# Altium PCB PCB.PcbDoc (part 1 of 5)
Units mil, origin at the board's own origin, x right, y up, seen from the top; angles counter-clockwise.
Board outline 7500 x 6500 mil, 2 copper layers (Top Layer, Bottom Layer); 229 components, 273 nets, 1476 pads, 506 vias.
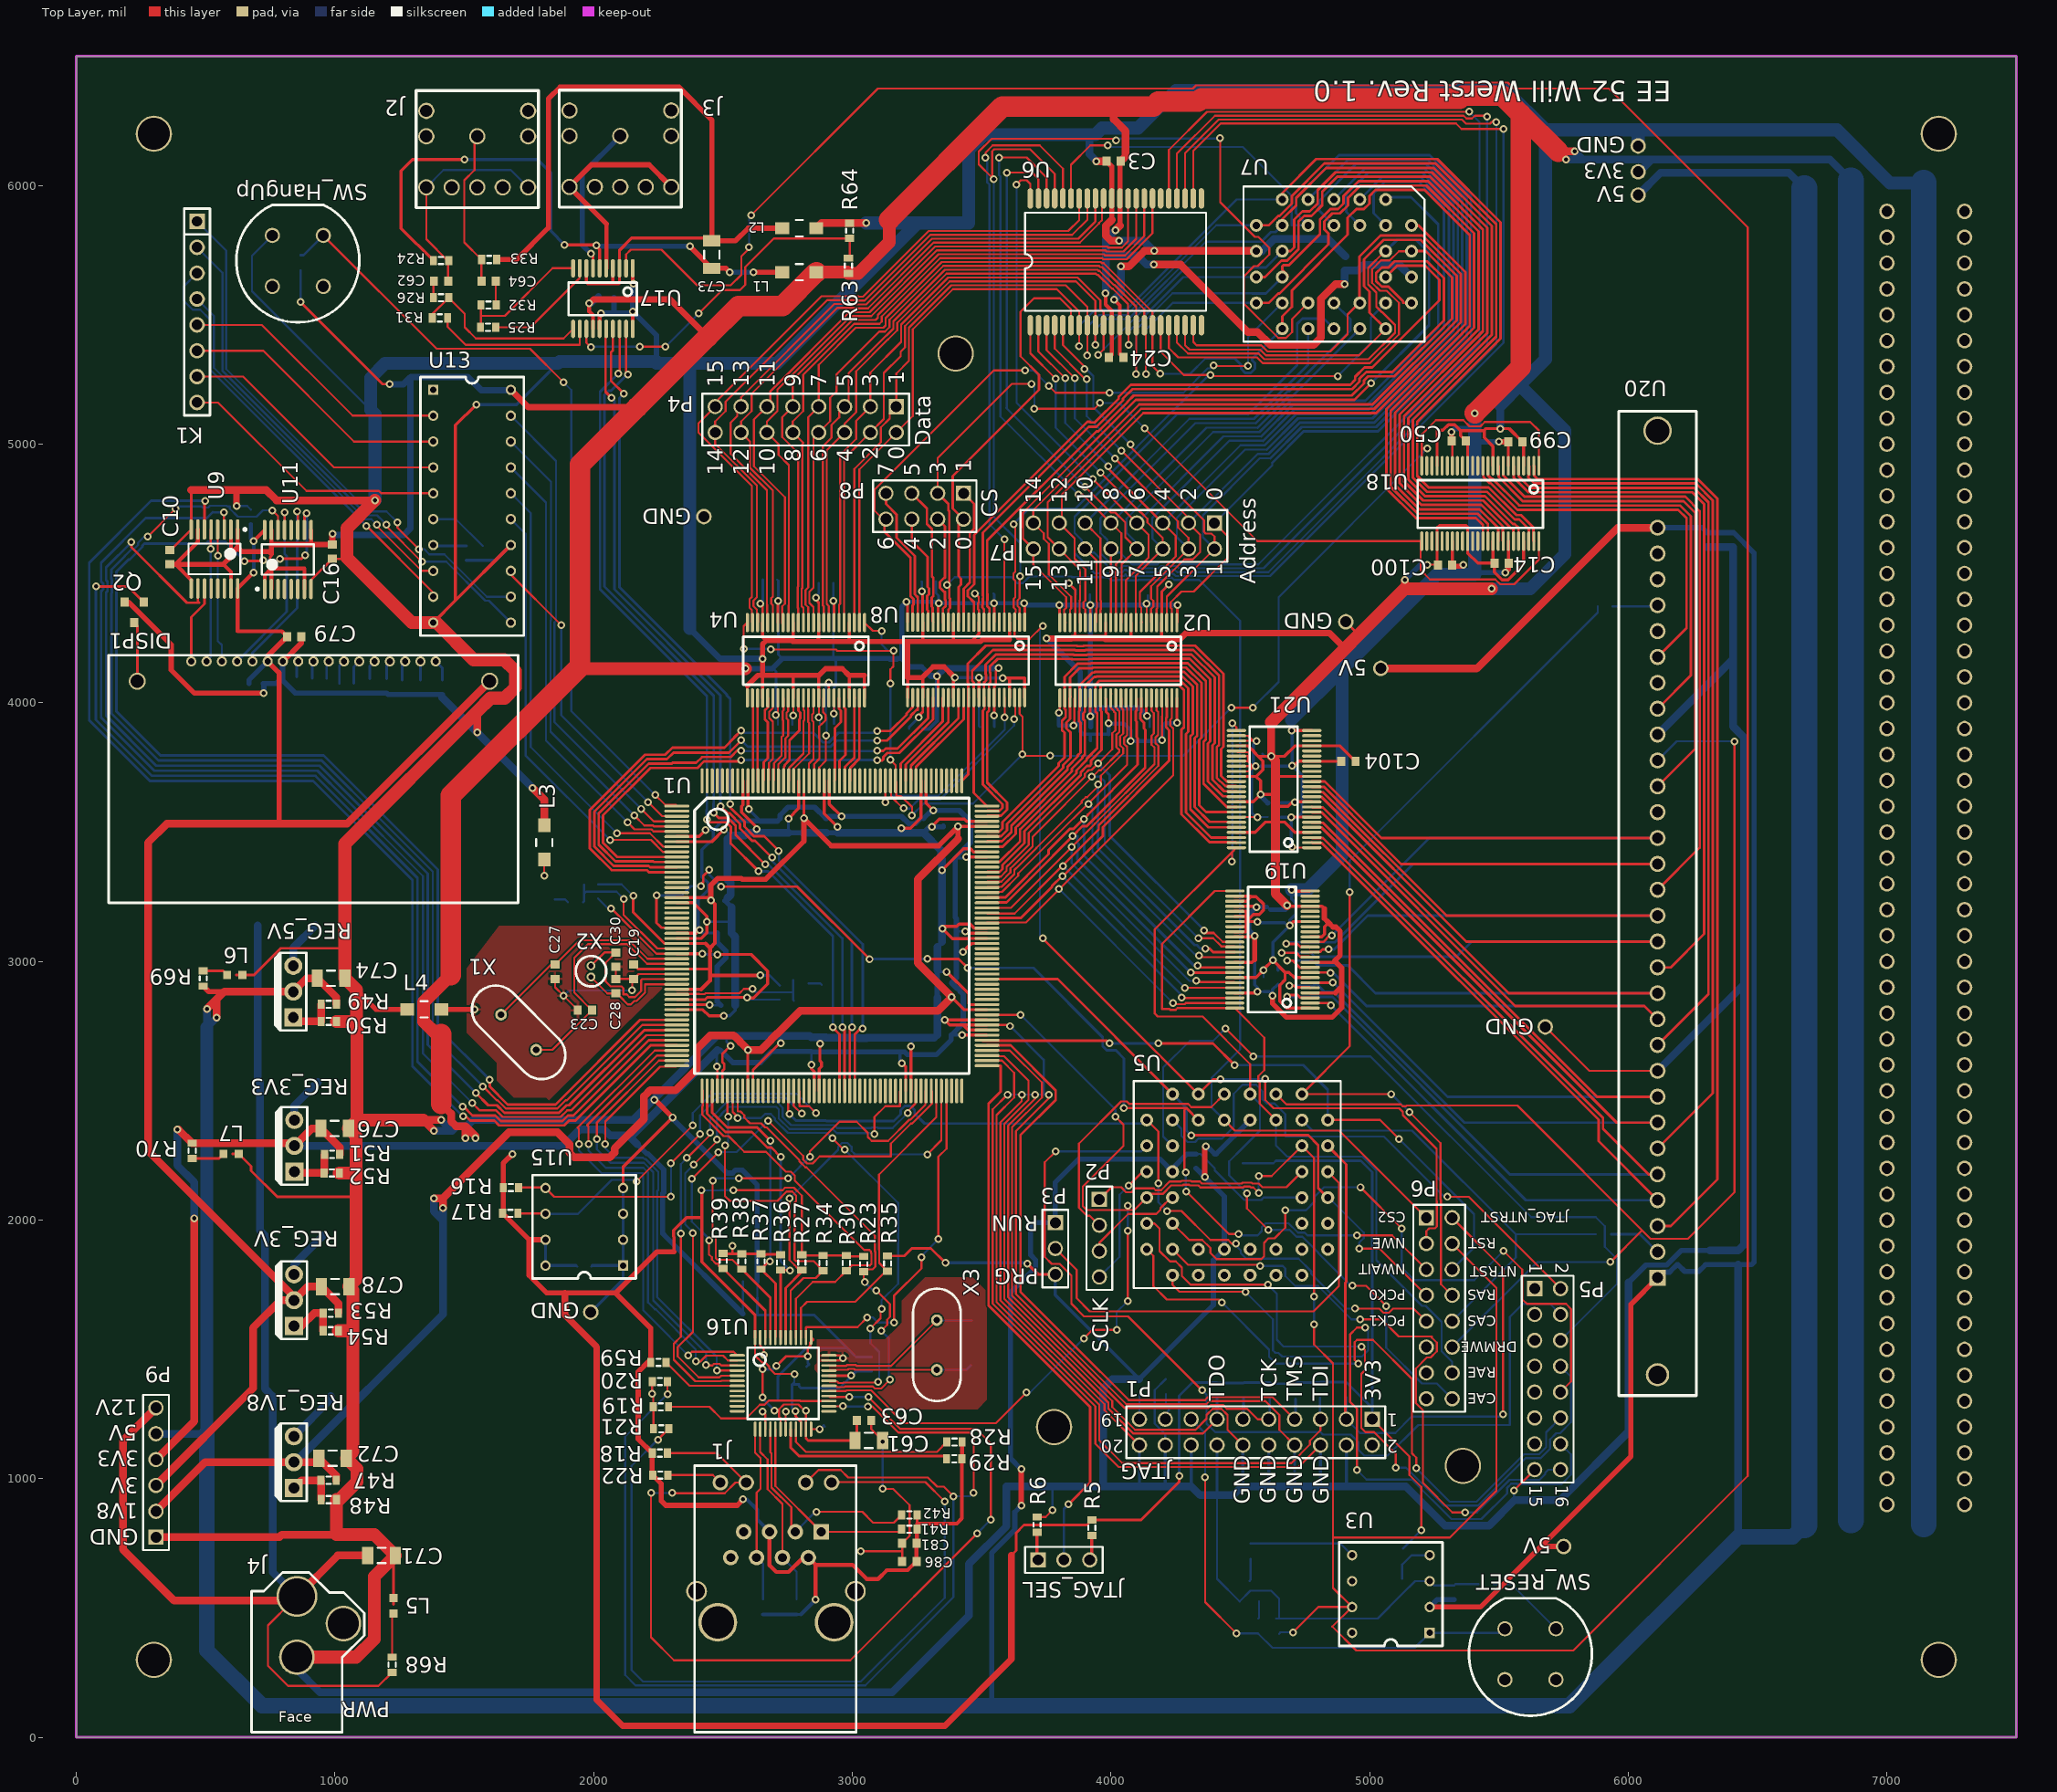
[diagram p0: Top Layer view]
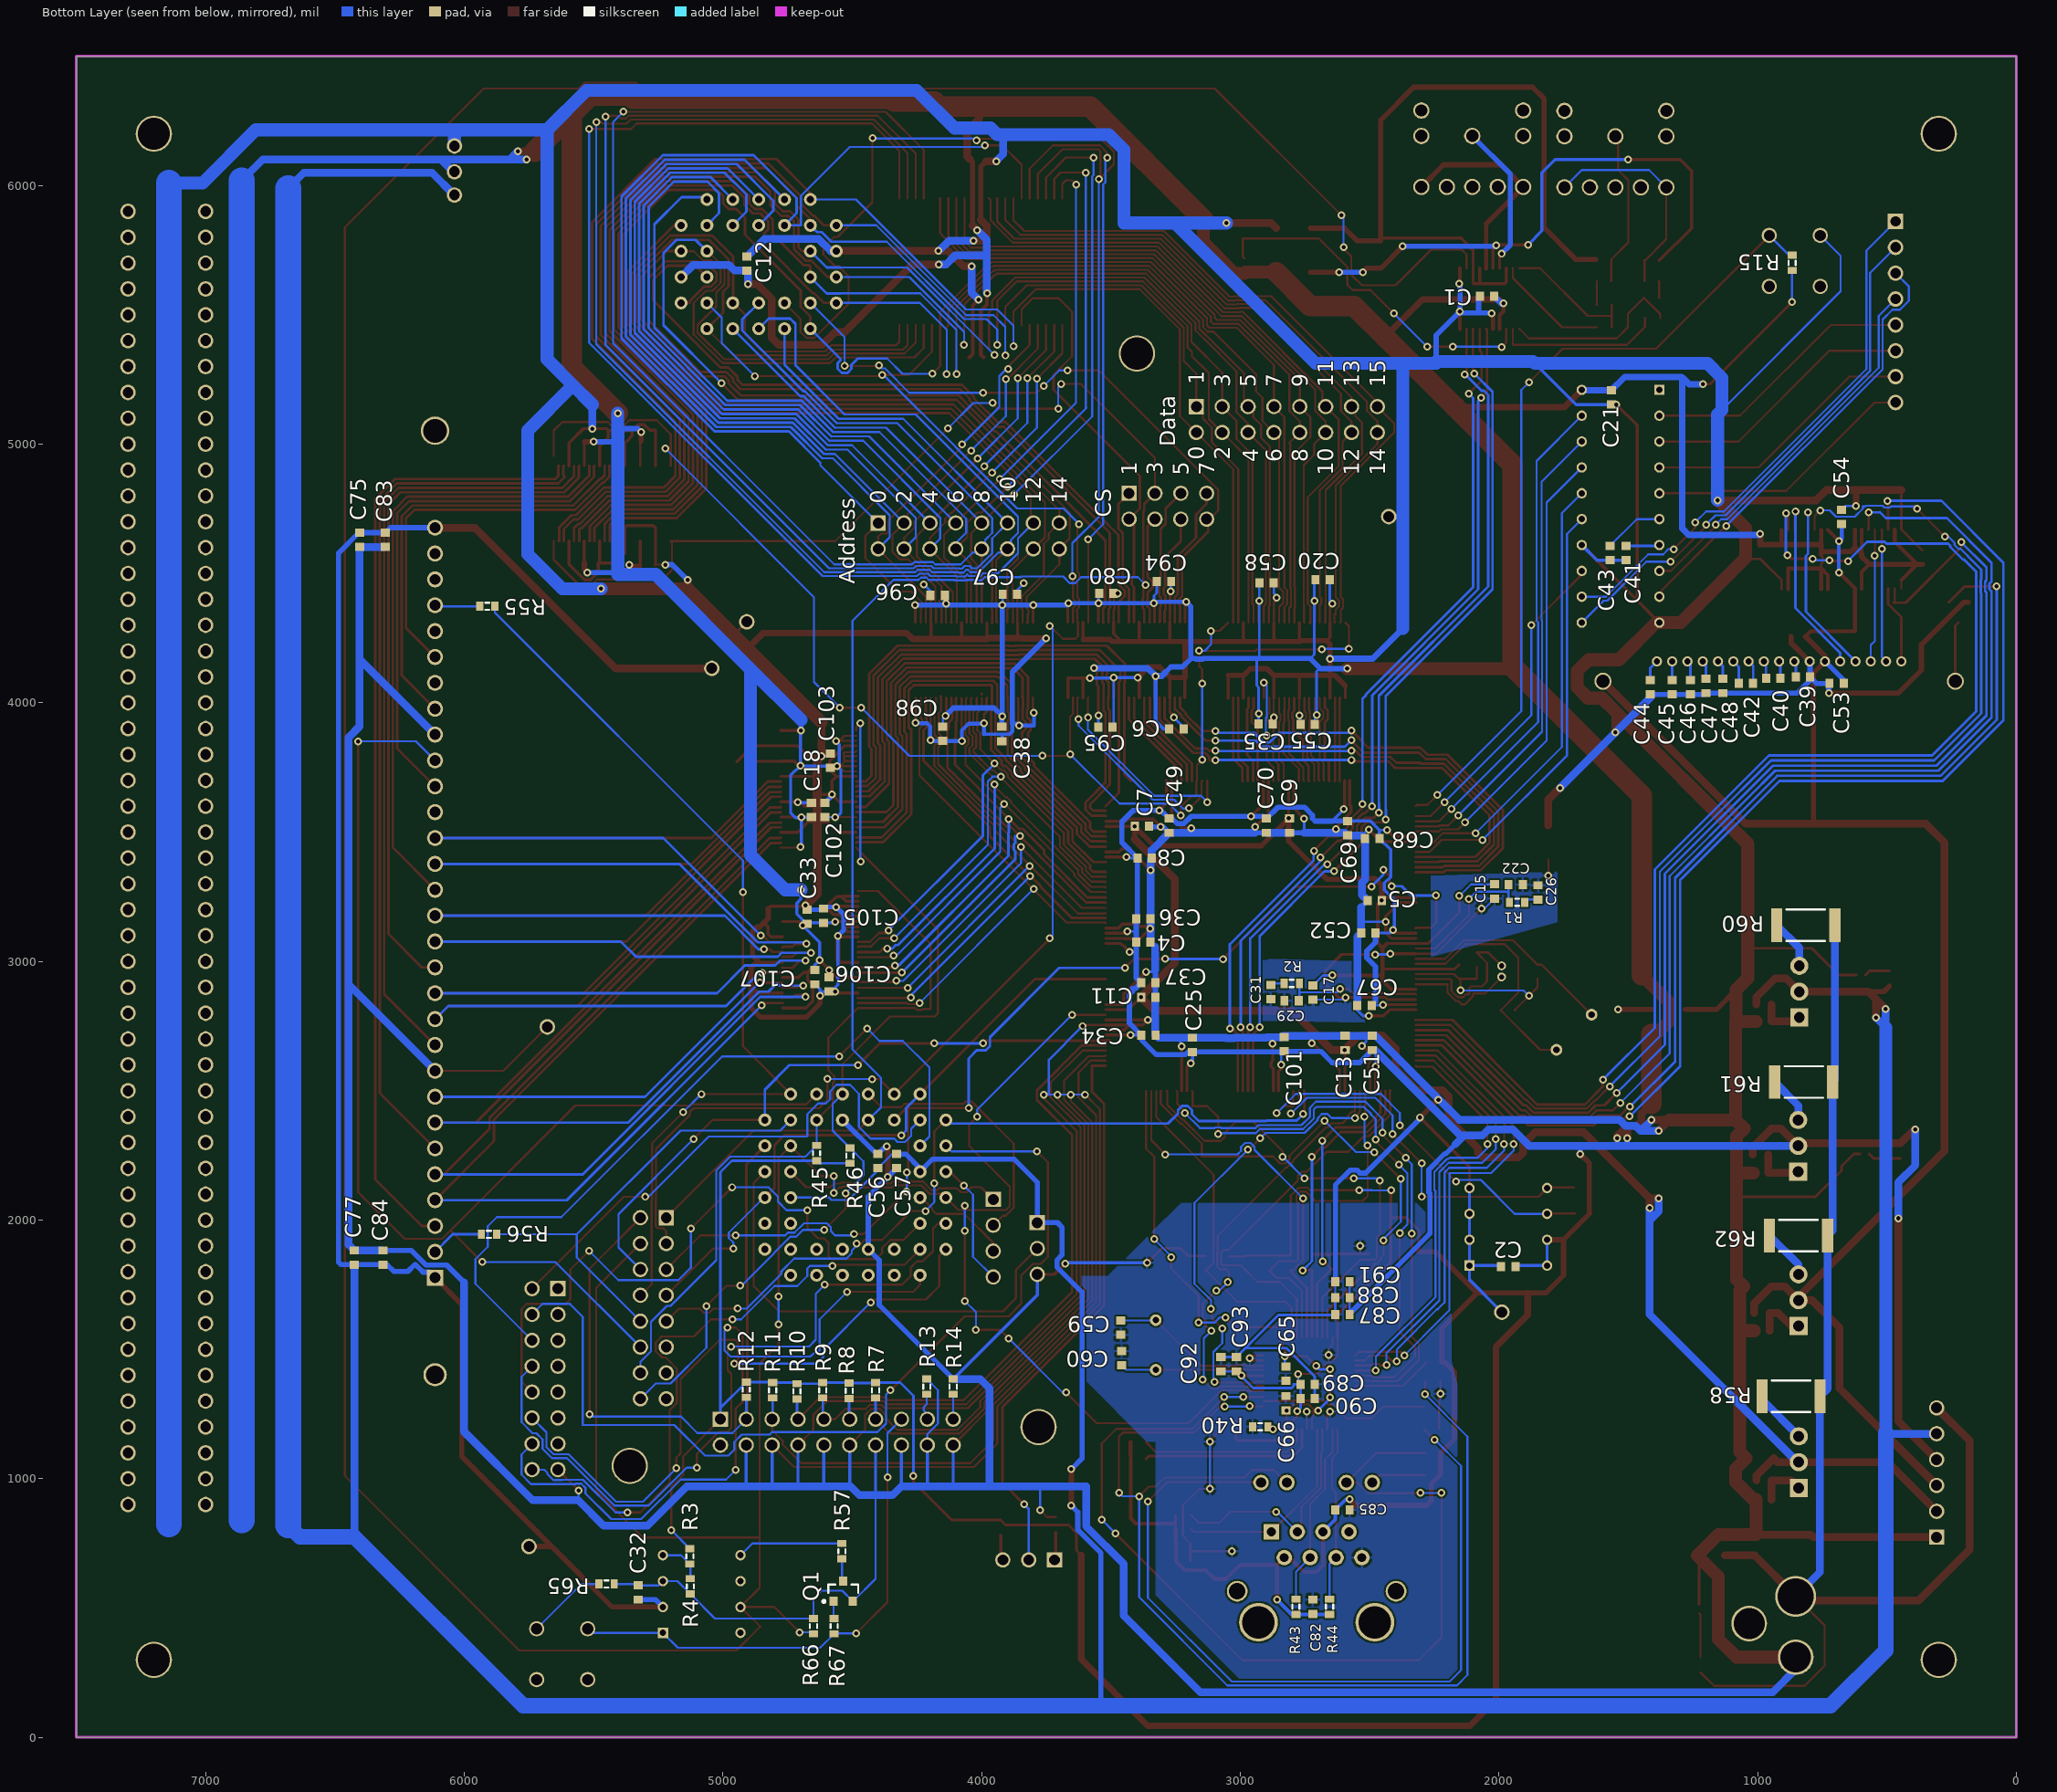
[diagram p1: Bottom Layer view, seen from below]

## Layer stack, top to bottom
Top Solder: solder mask 0.4, Solder Resist, Dk 3.5
Top Layer: signal copper 1.4
Dielectric 1: dielectric 12.6, FR-4, Dk 4.8
Bottom Layer: signal copper 1.4
Bottom Solder: solder mask 0.4, Solder Resist, Dk 3.5

## Board outline
0,0 7500,0 7500,6500 0,6500

## Design rules (kind name [scope] priority, off if disabled: settings)
Clearance [All] p1: gap=7 ignorepadtopadclearanceinfootprint=FALSE except(0: Arc-Hole Track-Hole SMDPad-Hole THPad-Hole Via-Hole Fill-Hole Poly-Hole Region-Hole Text-Hole)
HoleSize [All] p1: absolutevalues=TRUE maxlimit=250 minlimit=10 maxpercent=80.000 minpercent=20.000
MinimumAnnularRing [All] p1: minimumring=7
MinimumSolderMaskSliver [All] p1 off: minsoldermaskwidth=3
PlaneConnect [All] p1: planeconnectstyle=Relief reliefexpansion=15 reliefentries=4 reliefconductorwidth=10 reliefairgap=10
PolygonConnect [All] p1: connectstyle=Relief reliefconductorwidth=10 reliefentries=4 polygonreliefangle="90 Angle" airgapwidth=10
RoutingCorners [All] p1: cornerstyle=45-Degree minsetback=10 maxsetback=100
RoutingTopology [All] p1: topology=Daisy_Balanced
RoutingVias [All] p1: holewidth=16 width=30 viastyle="Through Hole" minholewidth=16 minwidth=30 maxholewidth=28 maxwidth=50
SilkToSilkClearance [All] p1: silktosilkclearance=6
SilkToSolderMaskClearance [IsPad] p1 off: minsilkscreentomaskgap=3 clearancetoexposedcopper=TRUE
SolderMaskExpansion [All] p1: expansion=2.5
Width [All] p1: maxlimit=100 minlimit=7 preferedwidth=8
23 further rules are at their usual default settings.

## Classes and differential pairs
net class A_3V3_BUF_[0..19]: A_3V3_BUF_0 A_3V3_BUF_1 A_3V3_BUF_2 A_3V3_BUF_3 A_3V3_BUF_4 A_3V3_BUF_5 A_3V3_BUF_6 A_3V3_BUF_7 A_3V3_BUF_8 A_3V3_BUF_9 A_3V3_BUF_10 A_3V3_BUF_11 A_3V3_BUF_12 A_3V3_BUF_13 A_3V3_BUF_14 A_3V3_BUF_15 A_3V3_BUF_16 A_3V3_BUF_17 A_3V3_BUF_18 A_3V3_BUF_19
net class ADDR[16..19]: ADDR0 ADDR1 ADDR2 ADDR3 ADDR4 ADDR5 ADDR6 ADDR7 ADDR8 ADDR9 ADDR10 ADDR11 ADDR12 ADDR13 ADDR14 ADDR15 ADDR16 ADDR17 ADDR18 ADDR19
net class D_3V3B[0..15]: D_3V3B0 D_3V3B1 D_3V3B2 D_3V3B3 D_3V3B4 D_3V3B5 D_3V3B6 D_3V3B7 D_3V3B8 D_3V3B9 D_3V3B10 D_3V3B11 D_3V3B12 D_3V3B13 D_3V3B14 D_3V3B15
net class DATA[0..15]: DATA0 DATA1 DATA2 DATA3 DATA4 DATA5 DATA6 DATA7 DATA8 DATA9 DATA10 DATA11 DATA12 DATA13 DATA14 DATA15
net class NCS3V3B[0..7]: NCS3V3B0 NCS3V3B1 NCS3V3B2 NCS3V3B3 NCS3V3B4 NCS3V3B5 NCS3V3B6 NCS3V3B7
net class NCS[4..7]: NCS0 NCS1 NCS2 NCS3 NCS4 NCS5 NCS6 NCS7

## Components (designator, comment, footprint, x,y, rotation, side; value= is the part's Value field where it differs from the comment)
C1 "" 1608[0603] 2046,5572 r0 bottom value=0.1uF
C2 "" 1608[0603] 1964,1820 r0 bottom value=0.1uF
C3 "" 1608[0603] 4010,6094 r180 top value=0.1uF
C4 "" 1608[0603] 3375,3075 r180 bottom value=0.1uF
C5 "" 1608[0603] 2480,3235 r180 bottom value=0.1uF
C6 "" 1608[0603] 3247,3899 r180 bottom value=0.1uF
C7 "" 1608[0603] 3380,3523 r0 bottom value=0.1uF
C8 "" 1608[0603] 3370,3400 r180 bottom value=0.1uF
C9 "" 1608[0603] 2810,3525 r90 bottom value=0.1uF
C10 "" 1608[0603] 362,4563 r90 top value=0.1uF
C11 "" 1608[0603] 3356,2861 r0 bottom value=0.1uF
C12 "" 1608[0603] 4907,5698.44 r90 bottom value=0.1uF
C13 "" 1608[0603] 2595,2685 r270 bottom value=0.1uF
C14 "" 1608[0603] 5510,4540 r180 top value=0.1uF
C15 "" 1608[0603] 2017,3270.56 r90 bottom value=0.1uF
C16 "" 1608[0603] 990,4584 r270 top value=0.1uF
C17 "" 1608[0603] 2719,2880 r90 bottom value=0.1uF
C18 "" 1608[0603] 4658,3586 r90 bottom value=0.1uF
C19 "" 1608[0603] 2155,2960 r90 top value=0.1uF
C20 "" 1608[0603] 2682,4476 r180 bottom value=0.1uF
C21 "" 1608[0603] 1566,5181 r270 bottom value=0.1uF
C22 "" 1608[0603] 1935.67,3297 r180 bottom value=1nF
C23 "" 1608[0603] 1966,2811 r180 top value=30pF
C24 "" 1608[0603] 4020,5335 r0 top value=0.1uF
C25 "" 1608[0603] 3185,2677.44 r90 bottom value=0.1uF
C26 "" 1608[0603] 1849,3267 r90 bottom value=10nF
C27 "" 1608[0603] 1851,2960 r270 top value=30pF
C28 "" 1608[0603] 2086,2904 r90 top value=16pF
C29 "" 1608[0603] 2802,2848 r0 bottom value=1nF
C30 "" 1608[0603] 2086,3007 r270 top value=16pF
C31 "" 1608[0603] 2882,2882 r270 bottom value=10nF
C32 "" 1608[0603] 5327,560 r90 bottom value=0.1uF
C33 "" 1608[0603] 4675,3172.44 r90 bottom value=0.1uF
C34 "" 1608[0603] 3355,2715 r180 bottom value=0.1uF
C35 "" 1608[0603] 2902,3919 r180 bottom value=0.1uF
C36 "" 1608[0603] 3375,3165 r180 bottom value=0.1uF
C37 "" 1608[0603] 3356,2917 r180 bottom value=0.1uF
C38 "" 1608[0603] 3922,3879.44 r270 bottom value=0.1uF
C39 "" 1608[0603] 825,4100 r180 bottom value=1uF
C40 "" 1608[0603] 940,4095 r180 bottom value=1uF
C41 "" 1608[0603] 1508,4579 r270 bottom value=1uF
C42 "" 1608[0603] 1045,4075 r180 bottom value=1uF
C43 "" 1608[0603] 1571,4579 r270 bottom value=0.1uF
C44 "" 1608[0603] 1415,4060 r90 bottom value=1uF
C45 "" 1608[0603] 1330,4060 r90 bottom value=1uF
C46 "" 1608[0603] 1260,4060 r90 bottom value=1uF
C47 "" 1608[0603] 1200,4065 r90 bottom value=1uF
C48 "" 1608[0603] 1135,4065 r90 bottom value=1uF
C49 "" 1608[0603] 3275,3525 r270 bottom value=0.1uF
C50 "" 1608[0603] 5344,5012 r0 top value=0.1uF
C51 "" 1608[0603] 2490,2685 r90 bottom value=0.1uF
C52 "" 1608[0603] 2505,3110 r0 bottom value=0.1uF
C53 "" 1608[0603] 695,4075 r0 bottom value=0.1uF
C54 "" 1608[0603] 675,4719 r90 bottom value=0.1uF
C55 "" 1608[0603] 2740,3916 r0 bottom value=0.1uF
C56 "" 1608[0603] 4401,2228 r90 bottom value=0.1uF
C57 "" 1608[0603] 4329,2228 r270 bottom value=0.1uF
C58 "" 1608[0603] 2898,4463 r180 bottom value=0.1uF
C59 "" 1608[0603] 3462,1584 r270 bottom value=30pF
C60 "" 1608[0603] 3459,1466 r90 bottom value=30pF
C61 "Tant" C1206 3064,1148 r0 top value=10uF
C62 "" 1608[0603] 1410,5630 r180 top value=0.22uF
C63 "" 1608[0603] 3045.56,1226 r0 top value=0.1uF
C64 "" 1608[0603] 1594,5630 r0 top value=0.22uF
C65 "" 1608[0603] 2824,1406 r270 bottom value=0.1uF
C66 "" 1608[0603] 2824,1292 r90 bottom value=0.1uF
C67 "" 1608[0603] 2520,2830 r0 bottom value=0.1uF
C68 "" 1608[0603] 2490,3475 r0 bottom value=0.1uF
C69 "" 1608[0603] 2585,3515 r270 bottom value=0.1uF
C70 "" 1608[0603] 2900,3525 r270 bottom value=0.1uF
C71 "" C1206 1180,703 r180 top value=10uF
C72 "" C1206 991,1079 r180 top value=10uF
C73 "" C1206 2457,5733 r270 top value=10uF
C74 "" C1206 985,2935 r180 top value=10uF
C75 "" 1608[0603] 6405,4630 r270 bottom value=1uF
C76 "" C1206 999,2354 r180 top value=10uF
C77 "" 1608[0603] 6425,1855 r90 bottom value=1uF
C78 "" C1206 1001,1743 r180 top value=10uF
C79 "" 1608[0603] 843,4256 r180 top value=1uF
C80 "" 1608[0603] 3517.56,4423 r180 bottom value=0.1uF
C81 "" 1608[0603] 3220.53,750 r180 top value=0.1uF
C82 "" 1608[0603] 2720,505 r90 bottom value=0.1uF
C83 "" 1608[0603] 6305,4630 r270 bottom value=0.01uF
C84 "" 1608[0603] 6315,1855 r90 bottom value=0.01uF
C85 "" 1608[0603] 2605,880 r180 bottom value=0.1uF
C86 "" 1608[0603] 3220.53,680 r180 top value=0.1uF
C87 "" 1608[0603] 2605,1635 r0 bottom value=0.1uF
C88 "" 1608[0603] 2605,1700 r0 bottom value=0.01uF
C89 "" 1608[0603] 2740,1365 r180 bottom value=0.1uF
C90 "" 1608[0603] 2740,1310 r180 bottom value=0.1uF
C91 "" 1608[0603] 2605,1762 r0 bottom value=1uF
C92 "" 1608[0603] 3075,1442.44 r90 bottom value=0.1uF
C93 "" 1608[0603] 3015,1442.44 r90 bottom value=0.01uF
C94 "" 1608[0603] 3295,4469 r180 bottom value=0.1uF
C95 "" 1608[0603] 3522,3906 r180 bottom value=0.1uF
C96 "" 1608[0603] 4170,4415 r0 bottom value=0.1uF
C97 "" 1608[0603] 3891,4419 r180 bottom value=0.1uF
C98 "" 1608[0603] 4150,3880 r270 bottom value=0.1uF
C99 "" 1608[0603] 5563,5009 r0 top value=0.1uF
C100 "" 1608[0603] 5291,4532 r180 top value=0.1uF
C101 "" 1608[0603] 2830,2680 r90 bottom value=0.1uF
C102 "" 1608[0603] 4606,3585.44 r90 bottom value=0.1uF
C103 "" 1608[0603] 4585,3776 r90 bottom value=0.1uF
C104 "" 1608[0603] 4918,3773 r0 top value=0.1uF
C105 "" 1608[0603] 4612,3177 r90 bottom value=0.1uF
C106 "" 1608[0603] 4590,2911 r270 bottom value=0.1uF
C107 "" 1608[0603] 4645,2939 r270 bottom value=0.1uF
DISP1 "Newhaven Display NHD-C12832A1Z-FSW-FBW-3V3" PCB-1539121-1 917.06,4160 r180 top locked
J1 "SI-50170" SI51070 2530,695 r0 top locked
J2 "Speaker" SJ1-352 1353.15,5993.15 r90 top locked
J3 "Microphone" SJ1-352 1906.3,5994.73 r90 top
J4 "Power Connector" EJ508A 853,20 r0 top locked
JTAG_SEL "Header 3" HDR1X3 3718,686 r0 top locked
K1 "KEYPAD4X4" SIP8 467,5861 r270 top locked
L1 "742792116" SMD-1206 2795,5665 r0 top
L2 "742792116" SMD-1206 2795,5835 r0 top
L3 "742792116" SMD-1206 1809,3460 r90 top
L4 "742792116" SMD-1206 1345,2815 r180 top
L5 "LED" LTST-C191KFKT 1226,478.94 r90 top
L6 "LED" LTST-C191KFKT 583,2948 r0 top
L7 "LED" LTST-C191KFKT 568.94,2256 r0 top
P1 "Header 10X2" HDR2X10 5010,1230 r180 top locked
P2 "Header 4" HDR1X4 3955,2080 r270 top
P3 "Header 3" HDR1X3 3785,1990 r270 top locked
P4 "Header 8X2" HDR2X8 3170,5145 r180 top locked
P5 "Header 8X2" HDR2X8 5638,1735 r270 top
P6 "Header 8X2" HDR2X8 5219,2009 r270 top
P7 "Header 8X2" HDR2X8 4400,4695 r180 top locked
P8 "Header 4X2" HDR2X4 3430,4810 r180 top locked
P9 "Header 6" HDR1X6 308,774 r90 top
Q1 "MMBFJ175LT1" ONSC-SOT-23-3-318-08_V 4535,565 r90 bottom
Q2 "DMG3420U" SOT23 224,4310 r180 top
R1 "Res3" J1-0603 1930,3229 r0 bottom value=909
R2 "Res3" J1-0603 2801,2915 r180 bottom value=1000
R3 "Res3" J1-0603 5128,700 r90 bottom value=12K
R4 "Res3" J1-0603 5126,584 r90 bottom value=10K
R5 "Res3" J1-0603 3926,810.47 r90 top value=10K
R6 "Res3" J1-0603 3714,822.47 r90 top value=10K
R7 "Res3" J1-0603 4410,1342 r90 bottom value=10K
R8 "Res3" J1-0603 4512,1340 r90 bottom value=10K
R9 "Res3" J1-0603 4614,1342 r90 bottom value=10K
R10 "Res3" J1-0603 4714,1338 r90 bottom value=10K
R11 "Res3" J1-0603 4808,1342 r90 bottom value=10K
R12 "Res3" J1-0603 4910,1344 r90 bottom value=10K
R13 "Res3" J1-0603 4212,1356 r90 bottom value=10K
R14 "Res3" J1-0603 4110,1356 r90 bottom value=10K
R15 "Res3" J1-0603 867,5701 r270 bottom value=10K
R16 "Res3" J1-0603 1680,2126 r180 top value=2.2k
R17 "Res3" J1-0603 1678,2026 r180 top value=2.2k
R18 "Res3" J1-0603 2256,1099 r0 top value=2.2K
R19 "Res3" J1-0603 2260,1278 r0 top value=2.2K
R20 "Res3" J1-0603 2256,1376 r0 top value=2.2K
R21 "Res3" J1-0603 2261,1193 r0 top value=220
R22 "Res3" J1-0603 2258,1014 r0 top value=220
R23 "Res3" J1-0603 3044,1830 r270 top value=1.5K
R24 "Res3" J1-0603 1410,5710 r180 top value=2K
R25 "Res3" J1-0603 1592,5452 r0 top value=510K
R26 "Res3" J1-0603 1410,5566 r0 top value=34K
R27 "Res3" J1-0603 2805,1836 r90 top value=2.2K
R28 "Res3" J1-0603 3395,1142 r180 top value=2.2K
R29 "Res3" J1-0603 3394,1077 r180 top value=2.2K
R30 "Res3" J1-0603 2977,1834 r90 top value=2.2K
R31 "Res3" J1-0603 1406,5488 r0 top value=510K
R32 "Res3" J1-0603 1593.53,5538 r180 top value=34K
R33 "Res3" J1-0603 1596,5714 r180 top value=2K
R34 "Res3" J1-0603 2887,1834 r90 top value=2.2K
R35 "Res3" J1-0603 3136,1832 r90 top value=2.2K
R36 "Res3" J1-0603 2723,1836 r270 top value=2.2K
R37 "Res3" J1-0603 2647,1840 r270 top value=2.2K
R38 "Res3" J1-0603 2573,1840 r270 top value=2.2K
R39 "Res3" J1-0603 2501,1842 r90 top value=2.2K
R40 "Res3" J1-0603 2923,1201 r0 bottom value=4.87K
R41 "Res3" J1-0603 3220.53,805 r0 top value=49.9
R42 "Res3" J1-0603 3220.53,860 r0 top value=49.9
R43 "Res3" J1-0603 2785,505 r270 bottom value=49.9
R44 "Res3" J1-0603 2655,505 r270 bottom value=49.9
R45 "Res3" J1-0603 4638,2259 r270 bottom value=10K
R46 "Res3" J1-0603 4509,2249 r270 bottom value=10K
R47 "Res3" J1-0603 975.53,994 r0 top value=120
R48 "Res3" J1-0603 976,919 r180 top value=52.3
R49 "Res3" J1-0603 976,2834 r0 top value=120
R50 "Res3" J1-0603 976,2768 r180 top value=365
R51 "Res3" J1-0603 989,2254 r0 top value=120
R52 "Res3" J1-0603 988,2182 r180 top value=196
R53 "Res3" J1-0603 984,1640 r0 top value=120
R54 "Res3" J1-0603 984,1572 r180 top value=169
R55 "Res3" J1-0603 5911,4373 r180 bottom value=0
R56 "Res3" J1-0603 5904.53,1945 r180 bottom value=0
R57 "Res3" J1-0603 4540,720 r270 bottom value=0
R58 "1W" RESC6332 871,1319 r0 bottom value=2.2
R59 "Res3" J1-0603 2250.47,1450 r180 top value=2.2K
R60 "1W" RESC6332 814,3140 r180 bottom value=2.2
R61 "1W" RESC6332 822,2534 r180 bottom value=2.2
R62 "1W" RESC6332 842,1940 r180 bottom value=2.2
R63 "Res3" J1-0603 2985,5690 r270 top value=2.2k
R64 "Res3" J1-0603 2990,5825 r270 top value=2.2k
R65 "Res3" J1-0603 5450,593 r180 bottom value=1k
R66 "Res3" J1-0603 4650,430 r90 bottom value=100k
R67 "Res3" J1-0603 4570,430 r90 bottom value=1k
R68 "Res3" J1-0603 1221,281 r270 top value=1k
R69 "Res3" J1-0603 491,2934 r270 top value=330
R70 "Res3" J1-0603 448,2268 r90 top value=150
REG_1V8 "LM1086-ADJ" TO-220V 841,964 r90 top locked
REG_3V "LM1086-ADJ" TO-220V 842,1590 r90 top locked
REG_3V3 "LM1086-ADJ" TO-220V 843,2187 r90 top locked
REG_5V "LM1086-ADJ" TO-220V 839,2783 r90 top locked
SW_HangUp "KS01Q01" KS01Q01 955,5806.85 r0 top locked (schematic designator SW_HANGUP)
SW_RESET "KS01Q01" KS01Q01 5720,420 r0 top
U1 "AT91RM9200" PQFP208 2755,3195 r0 top locked
U2 "74LVT16245" TSSOP48 4254.96,4310 r180 top locked
U3 "MAX705" DIPS8 5232,404 r180 top
U4 "74LVT16245" TSSOP48 3047.16,4310 r180 top locked
U5 "ISPLSI1016E" PLCCS44 4838,1787 r180 top locked
U6 "SRAM IDT71V016" SSOP44.400 3688.04,5460 r90 top locked
U7 "ROM 29LV040" PLCCS32 5162,6046 r270 top locked
U8 "74LVT16245" TSSOP48 3666.53,4311.34 r180 top locked
U9 "TI-CD40109B-16" TI-PW16_M 534,4556 r270 top locked
U11 "TI-CD40109B-16" TI-PW16_M 818,4554 r90 top locked
U13 "MM74C923" DIPS20 1380,5210 r0 top locked
U15 "24AA32" DIPS8 2114,1824 r180 top locked
U16 "DP83848" LQFP48 2531.68,1477.1 r0 top locked
U17 "TLV320AIC1106" PSOP20 2151.13,5680 r180 top locked
U18 "74LVT16245" TSSOP48 5654.33,4916.34 r180 top locked
U19 "74LVT16245" TSSOP48 4770,2819.41 r90 top locked
U20 "DRAM1MX8" SIMM30 6113,1777 r90 top locked
U21 "74LVT16245" TSSOP48 4776.34,3439.73 r90 top locked
X1 "20 MHz" HC-49U 1642,2794 r315 top
X2 "32.768 kHz" FX-3 1990,2983 r270 top
X3 "25 MHz" HC-49U 3327,1421 r90 top locked

## Footprints (in the part's own frame and the unit in brackets; to place one, negate y for a bottom-side part, rotate by r counter-clockwise, add the part's x,y. Pads: shape width x height; smd on the part's side, far side on the other; paste and mask are expansions set on the pad)
1608[0603] [mm] "Chip Capacitor, Body 1.6x0.8mm, IPC High Density"
  rect 0.8x0.9 smd: 1(-0.7,0) 2(0.7,0)
  body extent -0.87,-0.48 0.87,0.48, height 1.3
C1206 [mm] "Chip Capacitor, Body 3.2x1.6mm, IPC High Density"
  rect 1.1x1.7 smd: 1(-1.35,0) 2(1.35,0)
  silkscreen extent -0.4,-0.75 0.4,0.75, body extent -1.7,-0.9 1.7,0.9, height 1.3
DIPS8 [mil]
  rect 40x40 hole 25: 1(0,0)
  round 40 hole 25: 2(0,-100) 3(0,-200) 4(0,-300) 5(300,-300) 6(300,-200) 7(300,-100) 8(300,0)
  silkscreen extent -50,-350 350,50
DIPS20 [mil]
  rect 40x40 hole 25: 1(0,0)
  round 40 hole 25: 2(0,-100) 3(0,-200) 4(0,-300) 5(0,-400) 6(0,-500) 7(0,-600) 8(0,-700) 9(0,-800) 10(0,-900) 11(300,-900) 12(300,-800) 13(300,-700) 14(300,-600) 15(300,-500) 16(300,-400) 17(300,-300) 18(300,-200) 19(300,-100) 20(300,0)
  silkscreen extent -50,-950 350,50
EJ508A [mm]
  round 3.5 hole 3: GND(0,7.366)
  round 3.5 hole 3.05: SWITCH(4.572,10.668)
  round 4 hole 3.56: VCC(0,13.335)
  silkscreen extent -4.44,0 6.6,15.7
FX-3 [mil]
  round 34 hole 20: 1(0,0) 2(43,0)
  silkscreen extent -38,-59 80,59
HC-49U [mil]
  round 45 hole 25: 1(0,0) 2(192,0)
  silkscreen extent -121,-92 314,92
HDR1X3 [mm] "Connector; Header; 3 Position"
  rect 1.5x1.5 hole 1.067: 1(0,0)
  round 1.5 hole 1.067: 2(2.54,0) 3(5.08,0)
  silkscreen extent -1.27,-1.27 6.35,1.27
HDR1X4 [mm] "Connector; Header; 4 Position"
  rect 1.5x1.5 hole 1.067: 1(0,0)
  round 1.5 hole 1.067: 2(2.54,0) 3(5.08,0) 4(7.62,0)
  silkscreen extent -1.27,-1.27 8.89,1.27
HDR1X6 [mm] "Connector; Header; 6 Position"
  rect 1.5x1.5 hole 1.067: 1(0,0)
  round 1.5 hole 1.067: 2(2.54,0) 3(5.08,0) 4(7.62,0) 5(10.16,0) 6(12.7,0)
  silkscreen extent -1.27,-1.27 13.97,1.27
HDR2X4 [mm] "Connector; Header; 4x2 Position"
  rect 1.5x1.5 hole 1.067: 1(0,0)
  round 1.5 hole 1.067: 2(0,2.54) 3(2.54,0) 4(2.54,2.54) 5(5.08,0) 6(5.08,2.54) 7(7.62,0) 8(7.62,2.54)
  silkscreen extent -1.27,-1.27 8.89,3.81
HDR2X8 [mm] "Connector; Header; 8x2 Position"
  rect 1.5x1.5 hole 1.067: 1(0,0)
  round 1.5 hole 1.067: 2(0,2.54) 3(2.54,0) 4(2.54,2.54) 5(5.08,0) 6(5.08,2.54) 7(7.62,0) 8(7.62,2.54) 9(10.16,0) 10(10.16,2.54) 11(12.7,0) 12(12.7,2.54) 13(15.24,0) 14(15.24,2.54) 15(17.78,0) 16(17.78,2.54)
  silkscreen extent -1.27,-1.27 19.05,3.81
HDR2X10 [mm] "Connector; Header; 10x2 Position"
  rect 1.5x1.5 hole 1.067: 1(0,0)
  round 1.5 hole 1.067: 2(0,2.54) 3(2.54,0) 4(2.54,2.54) 5(5.08,0) 6(5.08,2.54) 7(7.62,0) 8(7.62,2.54) 9(10.16,0) 10(10.16,2.54) 11(12.7,0) 12(12.7,2.54) 13(15.24,0) 14(15.24,2.54) 15(17.78,0) 16(17.78,2.54) 17(20.32,0) 18(20.32,2.54) 19(22.86,0) 20(22.86,2.54)
  silkscreen extent -1.27,-1.27 24.13,3.81
J1-0603 [mm] "Chip Resistor, Body 1.6x0.8mm, IPC High Density"
  rect 0.7x0.9 smd: 1(-0.75,0) 2(0.75,0)
  silkscreen extent -0.2,-0.35 0.2,0.35, body extent -0.85,-0.48 0.85,0.48, height 0.9
KS01Q01 [mm] "Normally Open Switch"
  round 1.5 hole 1.1 mask+0.04: 1(0,0) 2(-5,0) 3(0,-5) 4(-5,-5)
  silkscreen extent -8.54,-8.54 3.54,3
LQFP48 [mm]
  oval 1.5x0.25 smd: 1(0.6,0) 2(0.6,-0.5) 3(0.6,-1) 4(0.6,-1.5) 5(0.6,-2) 6(0.6,-2.5) 7(0.6,-3) 8(0.6,-3.5) 9(0.6,-4) 10(0.6,-4.5) 11(0.6,-5) 12(0.6,-5.5) 25(9.6,-5.5) 26(9.6,-5) 27(9.6,-4.5) 28(9.6,-4) 29(9.6,-3.5) 30(9.6,-3) 31(9.6,-2.5) 32(9.6,-2) 33(9.6,-1.5) 34(9.6,-1) 35(9.6,-0.5) 36(9.6,0)
  oval 0.25x1.5 smd: 13(2.35,-7.25) 14(2.85,-7.25) 15(3.35,-7.25) 16(3.85,-7.25) 17(4.35,-7.25) 18(4.85,-7.25) 19(5.35,-7.25) 20(5.85,-7.25) 21(6.35,-7.25) 22(6.85,-7.25) 23(7.35,-7.25) 24(7.85,-7.25) 37(7.85,1.75) 38(7.35,1.75) 39(6.85,1.75) 40(6.35,1.75) 41(5.85,1.75) 42(5.35,1.75) 43(4.85,1.75) 44(4.35,1.75) 45(3.85,1.75) 46(3.35,1.75) 47(2.85,1.75) 48(2.35,1.75)
  silkscreen extent 1.6,-6.25 8.6,0.75
LTST-C191KFKT [mm] "Orange LED"
  rect 0.8x0.8 smd: A(0,0) K(1.5,0)
  Top Layer lines w0.254: 0.9,0 1.5,0
ONSC-SOT-23-3-318-08_V [mm] "SOT23, 3-Leads, Body 2.92x1.3mm, Pitch 0.95mm"
  rect 0.9x0.8 smd: 1(-1,0.95) 2(-1,-0.95) 3(1,0)
  silkscreen extent -1.12,-1.46 0.65,2.03, body extent -0.65,-1.46 0.65,1.46, height 1.11
PCB-1539121-1 [mm]
  round 1 hole 0.6: 1(-12,0) 2(-10.5,0) 3(-9,0) 4(-7.5,0) 5(-6,0) 6(-4.5,0) 7(-3,0) 8(-1.5,0) 9(0,0) 10(1.5,0) 11(3,0) 12(4.5,0) 13(6,0) 14(7.5,0) 15(9,0) 16(10.5,0) 17(12,0)
  round 1.676 hole 1.3: 18(-17.3,1.95) 19(17.3,1.95)
  silkscreen extent -20.1,-0.6 20.1,23.7, body extent -20.1,-0.6 20.1,23.7, height 4.9
PLCCS32 [mil]
  round 50 hole 28: 1(400,-100) 2(300,0) 3(300,-100) 4(200,0) 5(100,-100) 6(200,-100) 7(100,-200) 8(200,-200) 9(100,-300) 10(200,-300) 11(100,-400) 12(200,-400) 13(100,-500) 14(200,-600) 15(200,-500) 16(300,-600) 17(300,-500) 18(400,-600) 19(400,-500) 20(500,-600) 21(600,-500) 22(500,-500) 23(600,-400) 24(500,-400) 25(600,-300) 26(500,-300) 27(600,-200) 28(500,-200) 29(600,-100) 30(500,0) 31(500,-100) 32(400,0)
  silkscreen extent 50,-650 650,50
PLCCS44 [mil]
  round 50 hole 28: 1(400,-100) 2(300,0) 3(300,-100) 4(200,0) 5(200,-100) 6(100,0) 7(0,-100) 8(100,-100) 9(0,-200) 10(100,-200) 11(0,-300) 12(100,-300) 13(0,-400) 14(100,-400) 15(0,-500) 16(100,-500) 17(0,-600) 18(100,-700) 19(100,-600) 20(200,-700) 21(200,-600) 22(300,-700) 23(300,-600) 24(400,-700) 25(400,-600) 26(500,-700) 27(500,-600) 28(600,-700) 29(700,-600) 30(600,-600) 31(700,-500) 32(600,-500) 33(700,-400) 34(600,-400) 35(700,-300) 36(600,-300) 37(700,-200) 38(600,-200) 39(700,-100) 40(600,0) 41(600,-100) 42(500,0) 43(500,-100) 44(400,0)
  silkscreen extent -50,-750 750,50
PQFP208 [mm]
  oval 2.45x0.3 smd: 1(-11.004,10.307) 2(-11.004,9.807) 3(-11.004,9.307) 4(-11.004,8.807) 5(-11.004,8.307) 6(-11.004,7.807) 7(-11.004,7.307) 8(-11.004,6.807) 9(-11.004,6.307) 10(-11.004,5.807) 11(-11.004,5.307) 12(-11.004,4.807) 13(-11.004,4.307) 14(-11.004,3.807) 15(-11.004,3.307) 16(-11.004,2.807) 17(-11.004,2.307) 18(-11.004,1.807) 19(-11.004,1.307) 20(-11.004,0.807) 21(-11.004,0.307) 22(-11.004,-0.193) 23(-11.004,-0.693) 24(-11.004,-1.193) 25(-11.004,-1.693) 26(-11.004,-2.193) 27(-11.004,-2.693) 28(-11.004,-3.193) 29(-11.004,-3.693) 30(-11.004,-4.193) 31(-11.004,-4.693) 32(-11.004,-5.193) 33(-11.004,-5.693) 34(-11.004,-6.193) 35(-11.004,-6.693) 36(-11.004,-7.193) 37(-11.004,-7.693) 38(-11.004,-8.193) 39(-11.004,-8.693) 40(-11.004,-9.193) 41(-11.004,-9.693) 42(-11.004,-10.193) 43(-11.004,-10.693) 44(-11.004,-11.193) 45(-11.004,-11.693) 46(-11.004,-12.193) 47(-11.004,-12.693) 48(-11.004,-13.193) 49(-11.004,-13.693) 50(-11.004,-14.193) 51(-11.004,-14.693) 52(-11.004,-15.193) 105(19.446,-15.193) 106(19.446,-14.693) 107(19.446,-14.193) 108(19.446,-13.693) 109(19.446,-13.193) 110(19.446,-12.693) 111(19.446,-12.193) 112(19.446,-11.693) 113(19.446,-11.193) 114(19.446,-10.693) 115(19.446,-10.193) 116(19.446,-9.693) 117(19.446,-9.193) 118(19.446,-8.693) 119(19.446,-8.193) 120(19.446,-7.693) 121(19.446,-7.193) 122(19.446,-6.693) 123(19.446,-6.193) 124(19.446,-5.693) 125(19.446,-5.193) 126(19.446,-4.693) 127(19.446,-4.193) 128(19.446,-3.693) 129(19.446,-3.193) 130(19.446,-2.693) 131(19.446,-2.193) 132(19.446,-1.693) 133(19.446,-1.193) 134(19.446,-0.693) 135(19.446,-0.193) 136(19.446,0.307) 137(19.446,0.807) 138(19.446,1.307) 139(19.446,1.807) 140(19.446,2.307) 141(19.446,2.807) 142(19.446,3.307) 143(19.446,3.807) 144(19.446,4.307) 145(19.446,4.807) 146(19.446,5.307) 147(19.446,5.807) 148(19.446,6.307) 149(19.446,6.807) 150(19.446,7.307) 151(19.446,7.807) 152(19.446,8.307) 153(19.446,8.807) 154(19.446,9.307) 155(19.446,9.807) 156(19.446,10.307)
  oval 0.3x2.45 smd: 53(-8.529,-17.668) 54(-8.029,-17.668) 55(-7.529,-17.668) 56(-7.029,-17.668) 57(-6.529,-17.668) 58(-6.029,-17.668) 59(-5.529,-17.668) 60(-5.029,-17.668) 61(-4.529,-17.668) 62(-4.029,-17.668) 63(-3.529,-17.668) 64(-3.029,-17.668) 65(-2.529,-17.668) 66(-2.029,-17.668) 67(-1.529,-17.668) 68(-1.029,-17.668) 69(-0.529,-17.668) 70(-0.029,-17.668) 71(0.471,-17.668) 72(0.971,-17.668) 73(1.471,-17.668) 74(1.971,-17.668) 75(2.471,-17.668) 76(2.971,-17.668) 77(3.471,-17.668) 78(3.971,-17.668) 79(4.471,-17.668) 80(4.971,-17.668) 81(5.471,-17.668) 82(5.971,-17.668) 83(6.471,-17.668) 84(6.971,-17.668) 85(7.471,-17.668) 86(7.971,-17.668) 87(8.471,-17.668) 88(8.971,-17.668) 89(9.471,-17.668) 90(9.971,-17.668) 91(10.471,-17.668) 92(10.971,-17.668) 93(11.471,-17.668) 94(11.971,-17.668) 95(12.471,-17.668) 96(12.971,-17.668) 97(13.471,-17.668) 98(13.971,-17.668) 99(14.471,-17.668) 100(14.971,-17.668) 101(15.471,-17.668) 102(15.971,-17.668) 103(16.471,-17.668) 104(16.971,-17.668) 157(16.971,12.782) 158(16.471,12.782) 159(15.971,12.782) 160(15.471,12.782) 161(14.971,12.782) 162(14.471,12.782) 163(13.971,12.782) 164(13.471,12.782) 165(12.971,12.782) 166(12.471,12.782) 167(11.971,12.782) 168(11.471,12.782) 169(10.971,12.782) 170(10.471,12.782) 171(9.971,12.782) 172(9.471,12.782) 173(8.971,12.782) 174(8.471,12.782) 175(7.971,12.782) 176(7.471,12.782) 177(6.971,12.782) 178(6.471,12.782) 179(5.971,12.782) 180(5.471,12.782) 181(4.971,12.782) 182(4.471,12.782) 183(3.971,12.782) 184(3.471,12.782) 185(2.971,12.782) 186(2.471,12.782) 187(1.971,12.782) 188(1.471,12.782) 189(0.971,12.782) 190(0.471,12.782) 191(-0.029,12.782) 192(-0.529,12.782) 193(-1.029,12.782) 194(-1.529,12.782) 195(-2.029,12.782) 196(-2.529,12.782) 197(-3.029,12.782) 198(-3.529,12.782) 199(-4.029,12.782) 200(-4.529,12.782) 201(-5.029,12.782) 202(-5.529,12.782) 203(-6.029,12.782) 204(-6.529,12.782) 205(-7.029,12.782) 206(-7.529,12.782) 207(-8.029,12.782) 208(-8.529,12.782)
  silkscreen extent -9.28,-15.97 17.7,11.08
PSOP20 [mm]
  oval 0.4x1.8 smd: 1(0,0) 2(0.65,0) 3(1.3,0) 4(1.95,0) 5(2.6,0) 6(3.25,0) 7(3.9,0) 8(4.55,0) 9(5.2,0) 10(5.85,0) 11(5.85,5.95) 12(5.2,5.95) 13(4.55,5.95) 14(3.9,5.95) 15(3.25,5.95) 16(2.6,5.95) 17(1.95,5.95) 18(1.3,5.95) 19(0.65,5.95) 20(0,5.95)
  silkscreen extent -0.4,1.4 6.3,4.6
RESC6332 [mm] "Chip Resistor, Body 6.3x3.2mm, IPC High Density"
  rect 1.1x3.3 smd: 1(-2.85,0) 2(2.85,0)
  silkscreen extent -1.9,-1.55 1.9,1.55, body extent -3.22,-1.68 3.22,1.68, height 0.9
SI51070 [mil]
  rect 60x60 hole 35: 1(350,100)
  round 60 hole 35: 2(300,0) 3(250,100) 4(200,0) 5(150,100) 6(100,0) 7(50,100) 8(0,0)
  round 60 hole 40: 9(390,290) 10(290,290) 11(60,290) 12(-40,290)
  round 80 hole 63: ""(-132,-130) ""(482,-130)
  round 150 hole 125: ""(-50,-250) ""(400,-250)
  silkscreen extent -140,-675 485,355
SIMM30 [mil]
  rect 62x62 hole 42: 1(0,0)
  round 62 hole 42: 2(100,0) 3(200,0) 4(300,0) 5(400,0) 6(500,0) 7(600,0) 8(700,0) 9(800,0) 10(900,0) 11(1000,0) 12(1100,0) 13(1200,0) 14(1300,0) 15(1400,0) 16(1500,0) 17(1600,0) 18(1700,0) 19(1800,0) 20(1900,0) 21(2000,0) 22(2100,0) 23(2200,0) 24(2300,0) 25(2400,0) 26(2500,0) 27(2600,0) 28(2700,0) 29(2800,0) 30(2900,0)
  round 90 hole 70: ""(-375,0)
  round 110 hole 92: ""(3275,0)
  silkscreen extent -455,-150 3350,150
SIP8 [mil]
  rect 60x60 hole 40: 1(0,0)
  round 60 hole 40: 2(100,0) 3(200,0) 4(300,0) 5(400,0) 6(500,0) 7(600,0) 8(700,0)
  silkscreen extent -50,-50 750,50
SJ1-352 [mm]
  round 1.6 hole 1.2: A(0,-10) B(0,-7.5) C(0,-2.5) D(0,0) E(5,-5) ""(0,-5) ""(5,0) ""(5,-10) ""(7.5,-10) ""(7.5,0)
  silkscreen extent -2,-11 9.5,1
SMD-1206 [mm] "Chip Inductor, 2-Leads, Body 3.2x1.6x1.3 mm"
  rect 1.35x1.2 smd: 1(-1.675,0) 2(1.675,0)
  silkscreen extent -0.35,-0.8 0.35,0.8, body extent -1.6,-0.8 1.6,0.8, height 1.3
SOT23 [mm] "For DMG3420U"
  rect 0.8x0.9 smd: D(0,0) G(-0.95,-2) S(0.95,-2)
SSOP44.400 [mm]
  oval 2x0.55 smd: 1(0,0) 2(0,-0.8) 3(0,-1.6) 4(0,-2.4) 5(0,-3.2) 6(0,-4) 7(0,-4.8) 8(0,-5.6) 9(0,-6.4) 10(0,-7.2) 11(0,-8) 12(0,-8.8) 13(0,-9.6) 14(0,-10.4) 15(0,-11.2) 16(0,-12) 17(0,-12.8) 18(0,-13.6) 19(0,-14.4) 20(0,-15.2) 21(0,-16) 22(0,-16.8) 23(12.448,-16.8) 24(12.448,-16) 25(12.448,-15.2) 26(12.448,-14.4) 27(12.448,-13.6) 28(12.448,-12.8) 29(12.448,-12) 30(12.448,-11.2) 31(12.448,-10.4) 32(12.448,-9.6) 33(12.448,-8.8) 34(12.448,-8) 35(12.448,-7.2) 36(12.448,-6.4) 37(12.448,-5.6) 38(12.448,-4.8) 39(12.448,-4) 40(12.448,-3.2) 41(12.448,-2.4) 42(12.448,-1.6) 43(12.448,-0.8) 44(12.448,0)
  silkscreen extent 1.4,-17.27 11.05,0.51
TI-PW16_M [mm] "SOP, 16-Leads, Body 5x4.4mm, Pitch 0.65mm, IPC Low Density"
  oval 2x0.35 smd: 1(-2.9,2.275) 2(-2.9,1.625) 3(-2.9,0.975) 4(-2.9,0.325) 5(-2.9,-0.325) 6(-2.9,-0.975) 7(-2.9,-1.625) 8(-2.9,-2.275) 9(2.9,-2.275) 10(2.9,-1.625) 11(2.9,-0.975) 12(2.9,-0.325) 13(2.9,0.325) 14(2.9,0.975) 15(2.9,1.625) 16(2.9,2.275)
  silkscreen extent -3.02,-2.55 1.5,3.13, body extent -2.25,-2.55 2.25,2.55, height 1.2
TO-220V [mil]
  rect 70x70 hole 42: 1(0,0)
  round 70 hole 42: 2(100,0) 3(200,0)
  silkscreen extent -50,-50 250,70
TSSOP48 [mm]
  oval 0.3x1.9 smd: 1(0,0) 2(0.5,0) 3(1,0) 4(1.5,0) 5(2,0) 6(2.5,0) 7(3,0) 8(3.5,0) 9(4,0) 10(4.5,0) 11(5,0) 12(5.5,0) 13(6,0) 14(6.5,0) 15(7,0) 16(7.5,0) 17(8,0) 18(8.5,0) 19(9,0) 20(9.5,0) 21(10,0) 22(10.5,0) 23(11,0) 24(11.5,0) 25(11.5,7.4) 26(11,7.4) 27(10.5,7.4) 28(10,7.4) 29(9.5,7.4) 30(9,7.4) 31(8.5,7.4) 32(8,7.4) 33(7.5,7.4) 34(7,7.4) 35(6.5,7.4) 36(6,7.4) 37(5.5,7.4) 38(5,7.4) 39(4.5,7.4) 40(4,7.4) 41(3.5,7.4) 42(3,7.4) 43(2.5,7.4) 44(2,7.4) 45(1.5,7.4) 46(1,7.4) 47(0.5,7.4) 48(0,7.4)
  silkscreen extent -0.4,1.4 11.9,6.1

## Part data
C1 C2 C3 C4 C5 C6 C7 C8 C9 C10 C11 C12 C13 C14 C15 C16 C17 C18 C19 C20 C21 C22 C23 C24 C25 C26 C27 C28 C29 C30 C31 C32 C33 C34 C35 C36 C37 C38 C39 C40 C41 C42 C43 C44 C45 C46 C47 C48 C49 C50 C51 C52 C53 C54 C55 C56 C57 C58 C59 C60 C61 C62 C63 C64 C65 C66 C67 C68 C69 C70 C71 C72 C73 C74 C75 C76 C77 C78 C79 C80 C81 C82 C83 C84 C85 C86 C87 C88 C89 C90 C91 C92 C93 C94 C95 C96 C97 C98 C99 C100 C101 C102 C103 C104 C105 C106 C107: library part "Cap Semi", "Capacitor (Semiconductor SIM Model)", LatestRevisionDate=29-May-2009, LatestRevisionNote="IPC-7351 Footprint Added.", PackageDescription="Chip Capacitor", PackageReference=C1206, Published=8-Jun-2000, Publisher="Altium Limited"
DISP1: library part SYM-1539121-1
J1: "MagJack SI-50170 Ethernet Jack with LEDs"
J2 J3: library part "PHONEJACK STEREO SW", "3.5mm Stereo Jack with Switches PHONEJACK STEREO SW"
J4: library part EJ508A, "EJ508A"
JTAG_SEL P3: "Header, 3-Pin", LatestRevisionDate=17-Jul-2002, LatestRevisionNote="Re-released for DXP Platform.", Publisher="Altium Limited"
K1: "Grayhill 4x4 Keypad"
L1 L2 L3 L4: "SMD EMI Suppression Ferrite Bead WE-CBF, Z = 500 Ohm", ComponentLink1Description="Manufacturer URL", ComponentLink1URL=http://www.we-online.com, ComponentLink2Description=Datasheet, ComponentLink2URL=http://www.we-online.de/katalog/media/pdf/742792116.pdf, DatasheetVersion=Dec-2005, Impedance="500 Ohm", PackageDescription="Chip Inductor, 2-Leads, Body 3.2 x 1.6 mm", PackageReference=SMD-1206, PartNumber=742792116
L5 L6 L7: library part LTST-C191KFKT
P1: "Header, 10-Pin, Dual row", LatestRevisionDate=17-Jul-2002, LatestRevisionNote="Re-released for DXP Platform.", Publisher="Altium Limited"
P2: "Header, 4-Pin", LatestRevisionDate=17-Jul-2002, LatestRevisionNote="Re-released for DXP Platform.", Publisher="Altium Limited"
P4 P5 P6 P7: "Header, 8-Pin, Dual row", LatestRevisionDate=17-Jul-2002, LatestRevisionNote="Re-released for DXP Platform.", Publisher="Altium Limited"
P8: "Header, 4-Pin, Dual row", LatestRevisionDate=17-Jul-2002, LatestRevisionNote="Re-released for DXP Platform.", Publisher="Altium Limited"
P9: "Header, 6-Pin", LatestRevisionDate=17-Jul-2002, LatestRevisionNote="Re-released for DXP Platform.", Publisher="Altium Limited"
Q1: "JFET Chopper, P-Channel - Depletion, 3-Pin SOT-23, Tape and Reel", Manufacturer="On Semiconductor", Supplier Part Number 1=MMBFJ175LT1OSCT-ND, Channel Polarity="P Channel", Ciss Max (pF)=11, ComponentLink1Description="Manufacturer URL", ComponentLink1URL=http://www.onsemi.com/, ComponentLink2Description=Datasheet, ComponentLink2URL=http://www.onsemi.com/pub_link/Collateral/MMBFJ175LT1-D.PDF, ComponentLink3Description="Package Specification", ComponentLink3URL=http://www.onsemi.cn/pub_link/Collateral/318-08.PDF, Crss Max (pF)=5.5, DatasheetVersion="Rev. 5", IDSS Max (uA)=60000, IDSS Min (uA)=7000, Mounting Technology="Surface Mount", PackageDescription="3-Pin Small Outline Transistor, Body 2.92 x 1.3 mm, Pitch 0.95 mm", PackageReference=SOT-23-3-318-08, PackageVersion="Rev. AP, 11/2009", Packing="Tape and Reel", PartNumber=MMBFJ175LT1, Supplier 1=Digi-Key, V(BR)GSS Min (V)=30
Q2: library part DMG3420
R1 R2 R3 R4 R5 R6 R7 R8 R9 R10 R11 R12 R13 R14 R15 R16 R17 R18 R19 R20 R21 R22 R23 R24 R25 R26 R27 R28 R29 R30 R31 R32 R33 R34 R35 R36 R37 R38 R39 R40 R41 R42 R43 R44 R45 R46 R47 R48 R49 R50 R51 R52 R53 R54 R55 R56 R57 R59 R63 R64 R65 R66 R67 R68 R69 R70: "Resistor", LatestRevisionDate=29-May-2009, LatestRevisionNote="IPC-7351 Footprint Added.", PackageDescription="Chip Resistor", PackageReference=J1-0603, Published=8-Jun-2000, Publisher="Altium Limited"
R58 R60 R61 R62: library part Res3, "MCR100JZHJ2R2", LatestRevisionDate=29-May-2009, LatestRevisionNote="IPC-7351 Footprint Added.", PackageDescription="Chip Resistor", PackageReference=J1-0603, Published=8-Jun-2000, Publisher="Altium Limited"
REG_1V8 REG_3V REG_3V3 REG_5V: library part LM1086, "1.5A Low Dropout Positive Regulator"
U1: "Atmel ARM"
U2 U4 U8 U18 U19 U21: "16-Bit Bus Transceiver"
U3: "Maxim uP Supervisory Circuit"
U5: "In-System Programmable High Density CPLD"
U6: library part IDT71V016, "64K x 16 3.3V Static CMOS RAM"
U7: library part 29LV040, "4 Megabit (512K x 8) CMOS Uniform Sector Flash Memory"
U13: "20-Key Encoder"
U15: "I2C Serial EEPROM"
U16: "PHYTER - Single Port 10/100 Mb/s Ethernet Physical Layer Transceiver"
U17: "PCM Codec"
U20: "1M x 8 DRAM SIMM"
X1 X2 X3: library part CRYSTAL, "Crystal"

## Free pads (board coordinates)
  round 140 hole 125: 2(300,6200) 3(7200,6200) 4(7200,300) 5(300,300) 5(3780,1200) 6(5360,1050) 7(3400,5350)
  round 60 hole 42: 3V3_TEST_1(6038,6053) 5V_Test_2(5043,4133) 5V_Test_2(5750,738) 5V_TEST_2(6038,5963) 8(7300,5100) 8(7300,5900) 9(7300,5000) 9(7300,5800) 10(7300,4900) 10(7300,5700) 11(7300,4800) 11(7300,5600) 12(7300,4700) 12(7300,5500) 13(7300,4600) 13(7300,5400) 14(7300,4500) 14(7300,5300) 15(7300,4400) 15(7300,5200) 16(7300,4300) 17(7000,2300) 17(7000,5100) 17(7000,5900) 17(7300,2300) 18(7000,2200) 18(7000,5000) 18(7000,5800) 18(7300,2200) 19(7000,2100) 19(7000,4900) 19(7000,5700) 19(7300,2100) 20(7000,2000) 20(7000,4800) 20(7000,5600) 20(7300,2000) 21(7000,1900) 21(7000,4700) 21(7000,5500) 21(7300,1900) 22(7000,1800) 22(7000,4600) 22(7000,5400) 22(7300,1800) 23(7000,1700) 23(7000,4500) 23(7000,5300) 23(7300,1700) 24(7000,1600) 24(7000,4400) 24(7000,5200) 24(7300,1600) 25(7000,1500) 25(7000,4300) 25(7300,1500) 26(7000,1400) 26(7000,4200) 26(7300,1400) 27(7000,1300) 27(7000,4100) 27(7300,1300) 28(7000,1200) 28(7000,4000) 28(7300,1200) 29(7000,1100) 29(7000,3900) 29(7300,1100) 30(7000,900) 30(7000,3700) 30(7300,900) 31(7000,1000) 31(7000,3800) 31(7300,1000) 32(7000,3600) 33(7000,3500) 34(7000,3400) 35(7000,3300) 36(7000,3200) 37(7000,3100) 38(7000,3000) 39(7000,2900) 40(7300,4200) 41(7300,4100) 42(7300,4000) 43(7300,3900) 44(7300,3800) 45(7300,3700) 46(7300,3600) 47(7300,3500) 48(7300,3400) 49(7300,3300) 50(7300,3200) 51(7300,3100) 52(7300,3000) 53(7300,2900) 54(7000,2800) 55(7000,2700) 56(7000,2600) 57(7000,2400) 58(7000,2500) 59(7300,2800) 60(7300,2700) 61(7300,2600) 62(7300,2500) 63(7300,2400) GND_TEST_1(2426,4720) GND_TEST_2(4908,4313) GND_TEST_3(5679,2747) GND_TEST_4(1989,1644) GND_TEST_5(6038,6153)

## Via types
v1: diameter 30, hole 16, Top Layer to Bottom Layer, 500 vias
v2: diameter 30, hole 16, Top Layer to Bottom Layer, tented top, 6 vias

## Nets (pads, with @x,y where several pads share a name; then routed paths per layer and width w, separated by ;. In a path a pad name is that pad's centre, name@x,y a point inside that pad or via, vN(x,y) a via of type N, cw(c..) or ccw(c..) an arc to the next point about the centre after c; other vN are vias at no path point)
1V8: C5.2 C7.2 C9.2 C11.2 C13.2 C15.2 C17.2 C19.2 C72.2 P9.2 R47.2 REG_1V8.2 U1.19 U1.28 U1.33 U1.37 U1.62 U1.116 U1.152 U1.188 | length 9145.2
  Top Layer w8: v1@2643,2944 v1(2645,2946)
  Top Layer w10: v1(2153,3254) 2153,3190.1 2273.81,3069.29 U1.28@2321.77,3069.29 ; C19.2@2155,2987.56 2171.69,2970.87 U1.33@2321.77,2970.87 2448.13,2970.87 ; U1.62@2596.38,2499.41 2596.38,2657.38 v1(2597,2658)
  Top Layer w12: U1.37@2321.77,2892.13 2416.13,2892.13 ; U1.28@2321.77,3069.29 2432.71,3069.29 ; U1.19@2321.77,3246.46 2443.54,3246.46 v1(2453,3237) ; v1(2812.91,3553.09) U1.188@2812.91,3698.23 ; v1(3384.56,2862) 3433.17,2813.39 U1.116@3520.59,2813.39 ; v1(3408.95,3522.05) U1.152@3520.59,3522.05
  Top Layer w15: 2416.13,2892.13 2450,2926 2450,2946 ; 2432.71,3069.29 2450,3052 ; 2448.13,2970.87 2450,2969 ; v1(2453,3237) 2469,3221 2469,3071 2450,3052 ; v1(2645,2946) 2450,2946 ; 2450,2946 2450,2969 ; 2450,2969 2450,3014.28 2449.5,3014.78 2449.5,3039.22 2450,3039.72 2450,3052
  Top Layer w20: v1(2453,3237) 2453,3294.25 2479.75,3321 2571,3321 2574.87,3317.13 2665.13,3317.13 2812.91,3464.91 v1(2812.91,3553.09) 2919,3447 3333.9,3447 v1(3408.95,3522.05) 3408.95,3473.95
  Top Layer w30: P9.2@308,874 498,1064 REG_1V8.2@841,1064 922.85,1064 C72.2@937.85,1079 1005.06,1011.79 R47.2@1005.06,994 ; v1(1382,2084) 1417,2084 ; v1(1417,2046) 1417,2084 ; 3408.95,3473.95 3253,3318 3253,2993.56 v1(3384.56,2862) 3331.56,2809 2798.75,2809 2710.75,2721 2708.67,2721 2687,2699.33 2687,2697.25 2647.75,2658 v1(2597,2658) 2567,2688 2567,2689.33 2545.33,2711 2544,2711 2541,2714 2451,2714 2399,2662 2399,2584 2317,2502 2218.75,2502 2195,2478.25 2195,2391 2081,2277 2081,2260.75 2062.25,2242 1924.75,2242 1906,2260.75 1906,2294 1861,2339 1672,2339 1417,2084
  Bottom Layer w8: C15.2@2017,3298.12 2107.88,3298.12 2152,3254 v1(2153,3254) ; C9.2@2810,3552.56 2813.44,3552.56 v1(2812.91,3553.09) ; C11.2@3383.56,2861 v1(3384.56,2862) ; C7.2@3407.56,3523 3408,3523 v1(3408.95,3522.05)
  Bottom Layer w10: v1(2645,2946) 2680.56,2946 C17.2@2719,2907.56
  Bottom Layer w12: C5.2@2452.44,3235 2453,3235 v1(2453,3237)
  Bottom Layer w30: REG_1V8.2@841,1064 845.93,1064 1417,1635.07 1417,1999 ; v1(1382,2084) 1382,2034 1417,1999 ; v1(1417,2046) 1417,1999
3V: C53.1 C54.1 C78.2 C79.2 DISP1.12 DISP1.18 P9.3 R53.2 REG_3V.2 U9.16 U11.16 | length 6404.2
  Top Layer w15: v1(685,4503.26) U9.16@623.57,4441.83 623.57,4276.32 795.12,4276.32 C79.2@815.44,4256 ; v1(685,4624.74) U11.16@728.43,4668.17
  Top Layer w20: 784,3532 784,4115.89 DISP1.12@739.89,4160 739.89,4180.45 C79.2@815.44,4256
  Top Layer w30: P9.3@308,974 683,1349 683,1583 790,1690 REG_3V.2@842,1690 ; R53.2@1013.53,1640 1013.53,1677.32 C78.2@947.85,1743 895,1743 REG_3V.2@842,1690 ; DISP1.18@1598.16,4083.23 1046.93,3532 784,3532 350,3532 277,3459 277,2268 842,1703 REG_3V.2@842,1690
  Bottom Layer w10: v1(685,4503.26) v1@686,4504.26
  Bottom Layer w15: C54.1@675,4691.44 675,4634.74 v1(685,4624.74) 686,4623.74 v1@686,4504.26
  Bottom Layer w20: C53.1@667.44,4075 667.44,4087.55 DISP1.12@739.89,4160